# Altium PCB PCB_Microfonos.PcbDoc
Units mm, origin at the board's own origin, x right, y up, seen from the top; angles counter-clockwise.
Board outline 50 x 50 mm, 2 copper layers (Top Layer, Bottom Layer); 36 components, 18 nets, 90 pads, 13 vias.
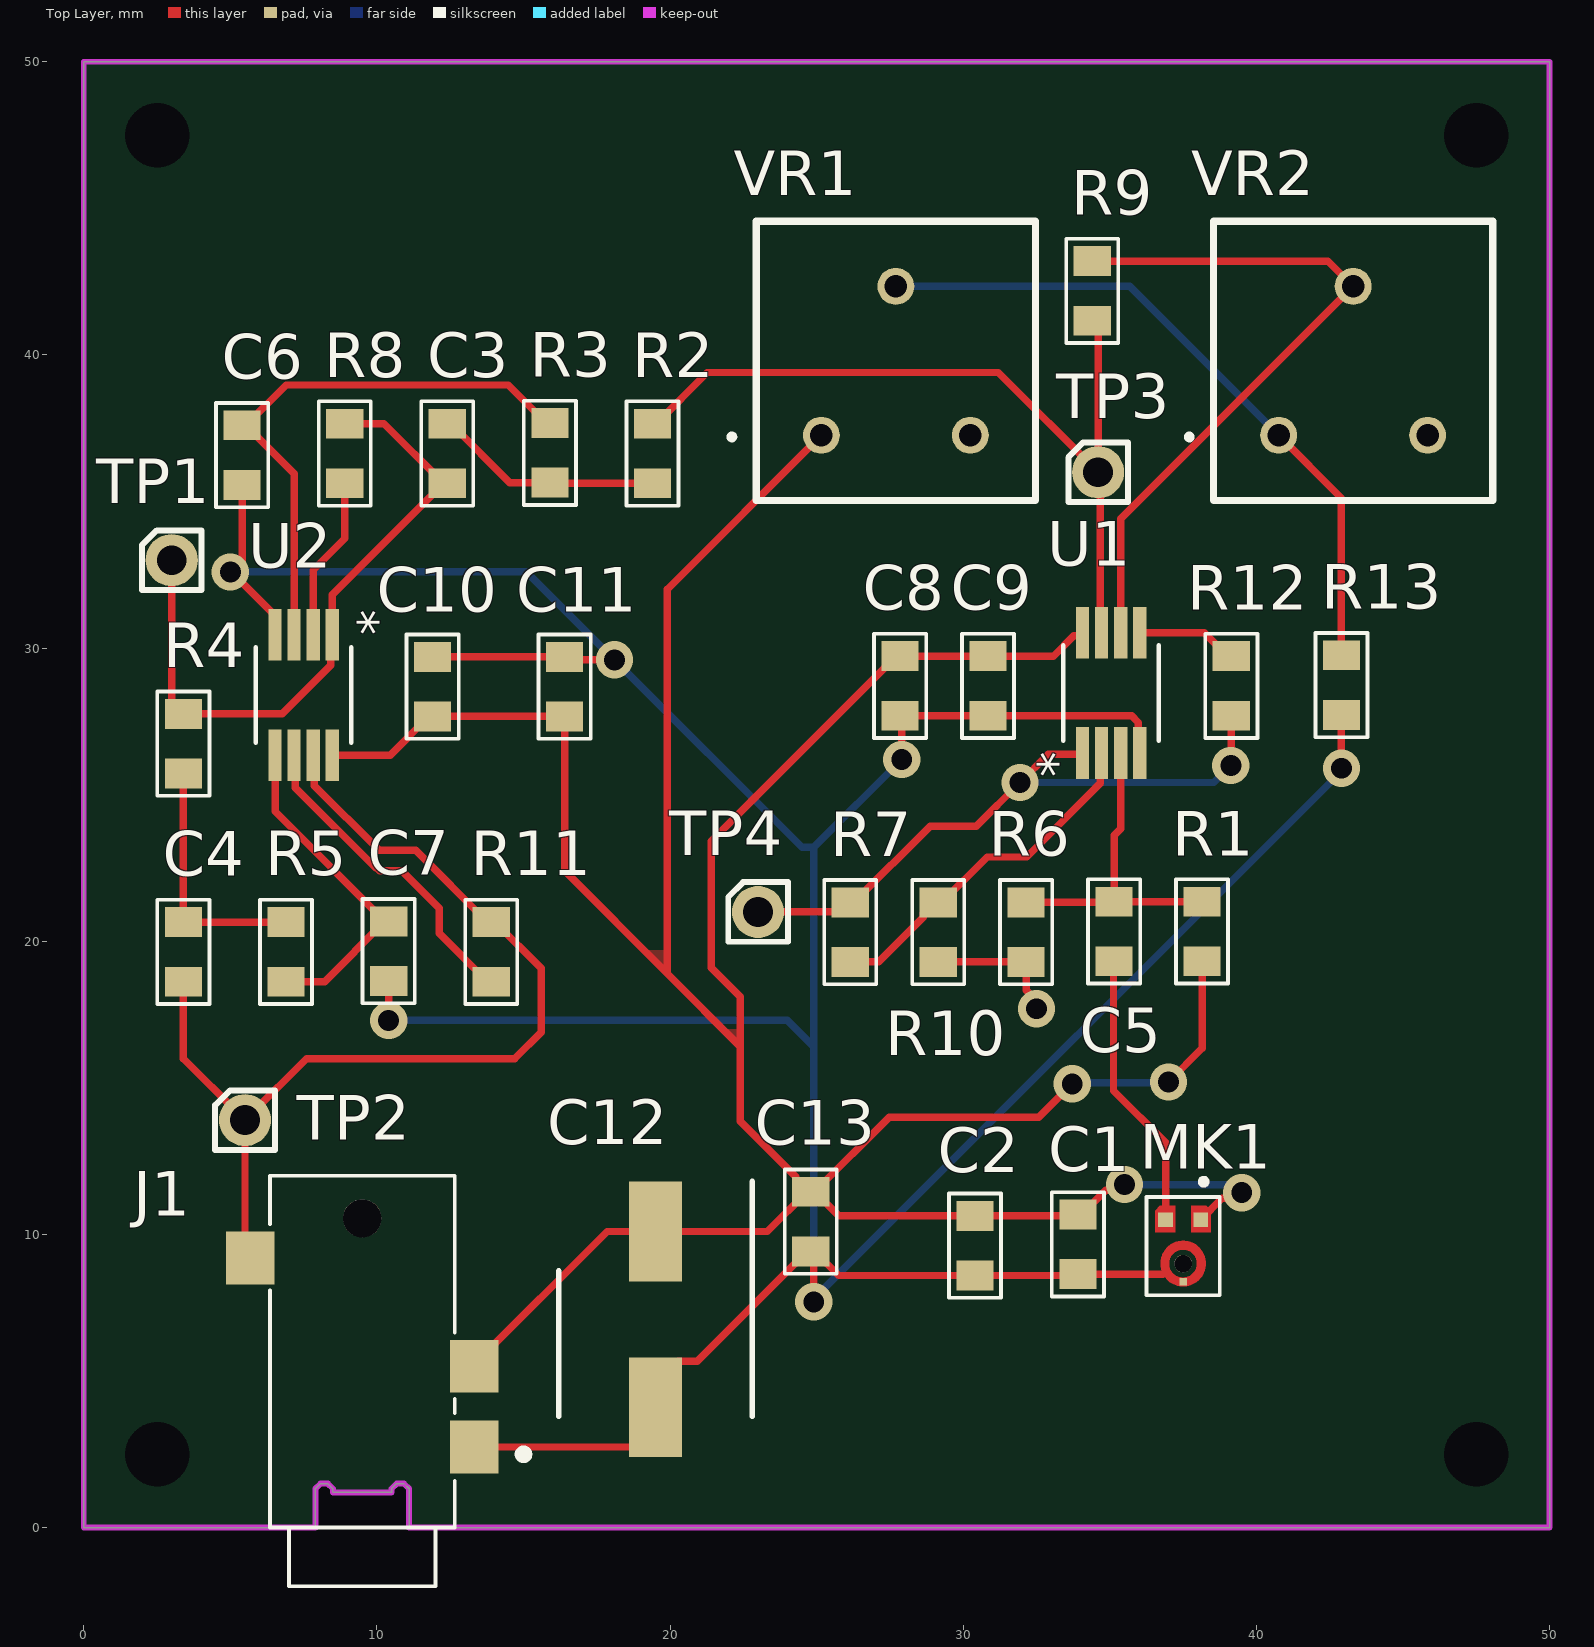
[diagram p0: Top Layer view]
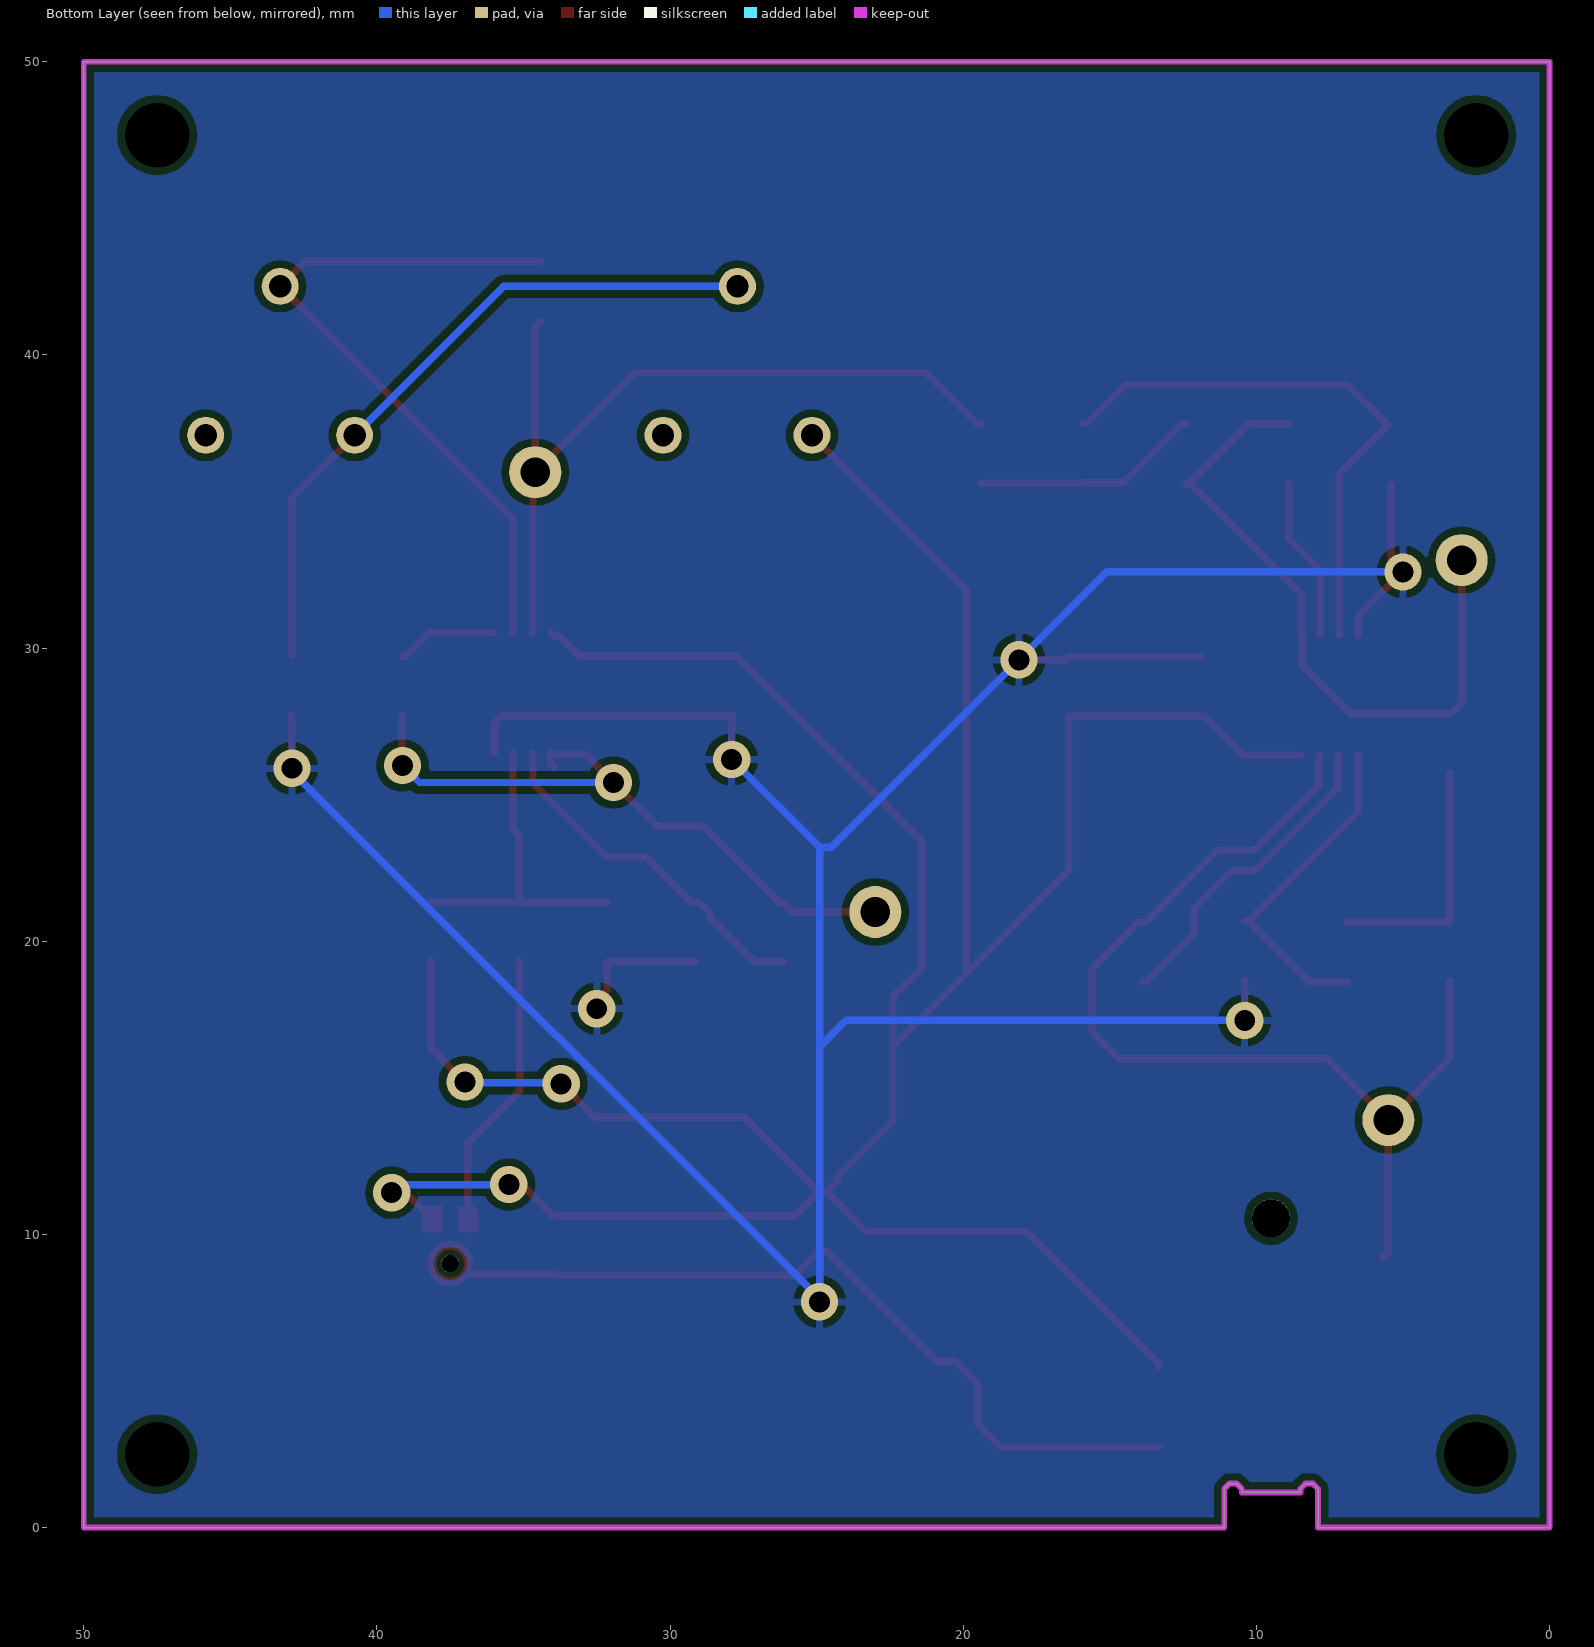
[diagram p1: Bottom Layer view, seen from below]

## Layer stack, top to bottom
Top Solder: solder mask 0.0102, Solder Resist, Dk 3.5
Top Layer: signal copper 0.0356
Dielectric 1: dielectric 0.32, FR-4, Dk 4.8
Bottom Layer: signal copper 0.0356
Bottom Solder: solder mask 0.0102, Solder Resist, Dk 3.5

## Board outline
11.1,1.325 10.925,1.5 10.675,1.5 10.5,1.325 10.5,1.2 8.5,1.2 8.5,1.3 8.5,1.325 8.325,1.5 8.2,1.5 8.075,1.5 7.9,1.325 7.9,1.2 7.9,0 0,0 0,50 50,50 50,0 11.1,0

## Design rules (kind name [scope] priority, off if disabled: settings)
Clearance [All] p1: gap=0.089 ignorepadtopadclearanceinfootprint=FALSE
HoleSize [All] p1: absolutevalues=TRUE maxlimit=6.3 minlimit=0.2 maxpercent=80.000 minpercent=20.000
MinimumSolderMaskSliver [All] p1: minsoldermaskwidth=0.089
PolygonConnect [All] p1: connectstyle=Relief reliefconductorwidth=0.254 reliefentries=4 polygonreliefangle="90 Angle" airgapwidth=0.254
RoutingVias [All] p1: holewidth=0.711 width=1.27 viastyle="Through Hole" minholewidth=0.2 minwidth=0.45 maxholewidth=0.711 maxwidth=1.27
SilkToSolderMaskClearance [IsPad] p1: minsilkscreentomaskgap=0.2 clearancetoexposedcopper=TRUE
SolderMaskExpansion [All] p1: expansion=0.102 istentingtop=FALSE
Width [All] p1: maxlimit=0.254 minlimit=0.127 preferedwidth=0.254
27 further rules are at their usual default settings.

## Classes and differential pairs
component class MICROFONO: C1 C2 MK1
component class "FILTRADO Y AMPLIFICACION": C3 C4 C5 C6 C7 C8 C9 C10 C11 R1 R2 R3 R4 R5 R6 R7 R8 R9 R10 R11 R12 R13 TP1 TP2 TP3 TP4 U1 U2 VR1 VR2
component class CONECTOR: C12 C13 J1

## Components (designator, comment, footprint, x,y, rotation, side; value= is the part's Value field where it differs from the comment)
C1 "100nF" 0805C-TBD 33.911,10.425 r270 top
C2 "100p" 0805C-GENERIC 30.4,10.378 r270 top
C3 "3.6n" 0805C-GENERIC 12.4,37.4 r270 top
C4 "5.6n" 0805C-GENERIC 3.4,20.4 r270 top
C5 "3u" 0805C-GENERIC 35.144,19.572 r90 top
C6 "360p" 0805C-GENERIC 5.4,35.822 r90 top
C7 "470p" 0805C-GENERIC 10.4,18.9 r90 top
C8 "100n" 0805C-GENERIC 27.844,29.472 r270 top
C9 "100p" 0805C-GENERIC 30.844,29.472 r270 top
C10 "100n" 0805C-GENERIC 11.9,27.922 r90 top
C11 "100p" 0805C-GENERIC 16.4,27.922 r90 top
C12 "EEE-HC1C101XP" CAPAE660X800N 19.5,7.1 r270 top
C13 "10u" 0805C-GENERIC 24.8,11.2 r270 top
J1 "SJ2-35953A-SMT-TR" CUI_SJ2-35953A-SMT-TR 9.5,6 r90 top
MK1 "INMP510" XDCR_INMP510 37.5,9.6 r270 top
R1 "110k" 0805R-GENERIC 38.144,19.572 r90 top
R2 "1.6k" 0805R-GENERIC 19.4,37.4 r270 top
R3 "47k" 0805R-GENERIC 15.9,35.9 r90 top
R4 "5.1k" 0805R-GENERIC 3.4,27.5 r270 top
R5 "5.1k" 0805R-GENERIC 6.9,20.4 r270 top
R6 "1.8k" 0805R-GENERIC 32.144,21.072 r270 top
R7 "62k" 0805R-GENERIC 26.144,21.072 r270 top
R8 "51k" 0805R-GENERIC 8.9,37.4 r270 top
R9 "20k" 0805R-GENERIC 34.4,41.422 r90 top
R10 "2k" 0805R-GENERIC 29.144,21.072 r270 top
R11 "10k" 0805R-GENERIC 13.9,20.4 r270 top
R12 "5.6k" 0805R-GENERIC 39.144,29.472 r270 top
R13 "820" 0805R-GENERIC 42.9,29.5 r270 top
TP1 "LPFE1" TESTPIN 3,33 r0 top
TP2 "LPFE2" TESTPIN 5.5,13.9 r0 top
TP3 "AMP" TESTPIN 34.6,36 r0 top
TP4 "HPF" TESTPIN 23,21 r0 top
U1 "Part Number: ADA4661-2ARMZ-R7" RM_8 35.044,28.472 r90 top value=Value
U2 "Part Number: ADA4661-2ARMZ-R7" RM_8 7.5,28.4 r270 top value=Value
VR1 "3310Y-001-102L" 3310Y-001 27.7,39.8 r0 top
VR2 "3310Y-001-103L" 3310Y-001 43.3,39.8 r0 top

## Footprints (in the part's own frame and the unit in brackets; to place one, negate y for a bottom-side part, rotate by r counter-clockwise, add the part's x,y. Pads: shape width x height; smd on the part's side, far side on the other; paste and mask are expansions set on the pad)
0805C-GENERIC [mil] "CAPACITOR 0805"
  rect 40x50 smd: 1(-10,0) 2(70,0)
  silkscreen extent -40,-35 100,35, body extent -11,-25 70,25, height 26
0805C-TBD [mil] "CAPACITOR 0805"
  rect 40x50 smd: 1(-10,0) 2(70,0)
  silkscreen extent -40,-35 100,35, body extent -11,-25 70,25, height 26
0805R-GENERIC [mil] "RESISTOR 0805"
  rect 40x50 smd: 1(-10,0) 2(70,0)
  silkscreen extent -40,-35 100,35, body extent -11,-25 70,25, height 27
3310Y-001 [mm]
  round 1.26 hole 0.76: 1(-2.54,-2.54) 2(0,2.54) 3(2.54,-2.54)
  silkscreen extent -5.65,-4.77 4.77,4.77, body extent -4.7,-4.76 4.83,4.76, height 6.38
CAPAE660X800N [mm]
  rect 3.4x1.8 smd: 1(-3,0) 2(3,0)
  silkscreen extent -4.7,-3.3 3.3,3.3, body extent -3.9,-3.4 3.9,3.4, height 8
CUI_SJ2-35953A-SMT-TR [mm]
  rect 1.8x1.65 smd: 1(-3.25,-3.825) 2(3.2,3.825) 3(-0.5,-3.825)
  round 1.3 hole 1.3 unplated: ""(4.55,0)
  silkscreen extent -8,-5.65 6,3.15
RM_8 [mm]
  rect 1.761x0.451 smd paste+0 mask+0: 1(-2.05,0.975) 2(-2.05,0.325) 3(-2.05,-0.325) 4(-2.05,-0.975) 5(2.05,-0.975) 6(2.05,-0.325) 7(2.05,0.325) 8(2.05,0.975)
  silkscreen extent -1.63,-1.63 1.63,1.63, body extent 0,0 0.25,0.25, height 0.25
TESTPIN [mil]
  round 70 hole 40: 1(0,0)
  silkscreen extent -40,-40 40,40, body extent -40,-40 40,40, height 470
XDCR_INMP510 [mm]
  rect 0.5x0.5 smd paste-1 mask+0: 1(-0.905,0.6) 2(-0.905,-0.6)
  rect 0.25x0.25 smd paste-1 mask+0: 3(1.215,0)
  round 0.6 hole 0.6 unplated: ""(0.595,0)
  Top Layer region: -0.475,0.27 -1.375,0.27 -1.375,0.79 -1.215,0.95 -0.475,0.95
  Top Layer region: -0.475,-0.95 -1.215,-0.95 -1.375,-0.79 -1.375,-0.27 -0.475,-0.27
  Top Layer region: 248 vertices and 0 holes, not listed, extent -0.18,-0.77 1.37,0.77
  silkscreen extent -2.3,-1.25 1.67,1.25

## Part data
C1: library part 0805C-100nF-25V-X7R-MUR, "CAPACITOR 0805 CERAMIC", Supplier Part Number 1=490-1673-1-ND, Supplier 1=Digi-Key
C2 C3 C4 C5 C6 C7 C8 C9 C10 C11 C13: library part C0805-GENERIC, "GENERIC CAPACITOR NON POLARISED0603"
C12: "Capacitor Polarised", Manufacturer_Name=Panasonic, Mouser Part Number=667-EEE-HC1C101XP, Allied Price/Stock=https://www.alliedelec.com/panasonic-eee-hc1c101xp/70258549/, Allied_Number=70258549, Datasheet Link=http://industrial.panasonic.com/www-cgi/jvcr13pz.cgi?E+PZ+3+ABA0109+EEEHC1C101XP+7+WW, Height=8mm, Manufacturer_Part_Number=EEE-HC1C101XP, Mouser Price/Stock=https://www.mouser.com/Search/Refine.aspx?Keyword=667-EEE-HC1C101XP
J1: "3.5 mm, Stereo, Right Angle, Surface Mount _SMT_, Audio Jack Connector", Package=None, Availability=Unavailable, CUI_purchase_URL=https://www.cuidevices.com/product/interconnect/connectors/audio-connectors/jacks/sj2-3595x-smt-series?utm_source=snapeda.com&utm_medium=referral&utm_campaign=snapedaBOM, MF="CUI Devices", MP=SJ2-35953A-SMT-TR, Price=None, SnapEDA_Link=https://www.snapeda.com/parts/SJ2-35953A-SMT-TR/CUI%20Devices/view-part/701771/?ref=snap
MK1: "60Hz ~ 20kHz Analog Microphone MEMS _Silicon_ 1.5V ~ 3.63V Omnidirectional _-38dB Â±2dB @ 94dB SPL_ Solder Pads", Package="LGA-3 TDK-InvenSense", Digi-Key_Part_Number=1428-1016-2-ND, Digi-Key_Purchase_URL=https://www.digikey.com/product-detail/en/tdk-invensense/INMP510ACEZ-R7/1428-1016-2-ND/4311534?utm_source=snapeda&utm_medium=aggregator&utm_campaign=symbol, MF="TDK InvenSense", MP=INMP510, SnapEDA_Link=https://www.snapeda.com/parts/INMP510/TDK%20InvenSense/view-part/2757133/?ref=snap
R1 R2 R3 R4 R5 R6 R7 R8 R9 R10 R11 R12 R13: library part R0805-GENERIC, "GENERIC RESISTOR 0805"
TP1 TP2 TP3 TP4: library part TESTPIN, "TESTPIN SINGLE PIN HEADER", Manufacturer 1="Sharon Long Industries", Manufacturer Part Number 1=Cut-it-yourself, Supplier 1 Part number=Cut-It-Yourself, Reel=TH, Supplier 1="Sharon Long Industries"
U1 U2: library part ADA4661-2ARMZ-R7, "No Description Available", Built_By=EMA_Christopher, Copyright="Copyright (C) 2016 Accelerated Designs. All rights reserved", Manufacturer_Part_Number=ADA4661-2ARMZ-R7, RefDes=RefDes, Type=DEV, Vendor="Analog Devices Inc"
VR1: library part 3310Y-001-103L, "Variable Resistor", Manufacturer_Name=Bourns, Mouser Part Number=652-3310Y-001-103L, RS Part Number=5220625P, Datasheet Link=http://www.bourns.com/docs/Product-Datasheets/3310.pdf, Manufacturer_Part_Number=3310Y-001-103L, Mouser Price/Stock=https://www.mouser.com/Search/Refine.aspx?Keyword=652-3310Y-001-103L, RS Price/Stock=http://uk.rs-online.com/web/p/products/5220625P
VR2: "Variable Resistor", Manufacturer_Name=Bourns, Mouser Part Number=652-3310Y-001-103L, RS Part Number=5220625P, Datasheet Link=http://www.bourns.com/docs/Product-Datasheets/3310.pdf, Manufacturer_Part_Number=3310Y-001-103L, Mouser Price/Stock=https://www.mouser.com/Search/Refine.aspx?Keyword=652-3310Y-001-103L, RS Price/Stock=http://uk.rs-online.com/web/p/products/5220625P

## Free pads (board coordinates)
  round 1.524 hole 2.2 unplated: ""(2.5,2.5) ""(2.5,47.5) ""(47.5,2.5) ""(47.5,47.5)

## Via types
v1: diameter 1.27, hole 0.711, Top Layer to Bottom Layer, 13 vias

## Nets (pads, with @x,y where several pads share a name; then routed paths per layer and width w, separated by ;. In a path a pad name is that pad's centre, name@x,y a point inside that pad or via, vN(x,y) a via of type N, cw(c..) or ccw(c..) an arc to the next point about the centre after c; other vN are vias at no path point)
GND: C1.2 C2.2 C6.1 C7.1 C8.2 C9.2 C10.2 C11.2 C12.2 C13.2 J1.1 MK1.3 R6.2 R10.2 R13.2 U1.4 U2.4 | length 143.9
  Top Layer w0.254: v1(5,32.6) 5.03,32.6 6.525,31.105 U2.4 ; v1@5.4,32.6 C6.1 ; v1(10.4,17.3) C7.1 ; C10.2 C11.2 16.5,29.6 v1(18.1,29.6) ; J1.1 18.727,2.75 19.5,3.523 C12.2 19.5,4.9 20.273,5.673 20.924,5.673 24.673,9.422 C13.2 ; v1(24.9,7.7) 24.9,9.322 C13.2 ; v1(27.9,26.2) 27.9,27.639 C8.2 C9.2 35.742,27.694 35.976,27.461 35.976,26.466 U1.4 ; R10.2 R6.2 32.144,18.331 32.5,17.975 v1(32.5,17.7) ; 36.814,8.65 36.81,8.647 C1.2 33.864,8.6 25.749,8.6 24.927,9.422 C13.2 ; v1(42.9,25.9) R13.2
  Bottom Layer w0.254: v1(5,32.6) 15.1,32.6 v1(18.1,29.6) 24.5,23.2 24.9,23.2 ; v1(10.4,17.3) 24,17.3 24.9,16.4 ; v1(24.9,7.7) v1@24.9,7.8 ; v1(27.9,26.2) 24.9,23.2 ; v1(42.9,25.9) 42.9,25.8 v1@24.9,7.8 ; v1@24.9,7.8 24.9,16.4 ; 24.9,16.4 24.9,23.2
In_E1: C6.2 R3.2 U2.3 | length 19.3
  Top Layer w0.254: U2.3 7.175,35.952 5.527,37.6 6.902,38.975 14.476,38.975 15.773,37.678 R3.2
In_E2: C7.2 R5.2 U2.5 | length 11.6
  Top Layer w0.254: U2.5 6.525,24.426 C7.2@10.273,20.678 ; R5.2 8.217,18.622 C7.2@10.273,20.678 ; C7.2 C7.2@10.273,20.678
In_HP: C5.2 R1.2 R6.1 U1.3 | length 11.2
  Top Layer w0.254: R6.1 35.12,21.326 C5.2 ; U1.3 35.369,23.834 35.144,23.609 C5.2 ; R1.2 C5.2
NetC3_1: C3.1 R2.2 R3.1 | length 7.8
  Top Layer w0.254: C3.1 12.527,37.654 14.535,35.646 R3.1 15.924,35.622 R2.2
NetC4_1: C4.1 R4.2 R5.1 | length 8.6
  Top Layer w0.254: R4.2 C4.1 R5.1
NetC5_1: C5.1 MK1.2 | length 9.6
  Top Layer w0.254: C5.1 35.125,19.299 35.125,14.9 36.9,13.125 MK1.2
NetR7_2: R7.2 R10.1 U1.2 | length 12.2
  Top Layer w0.254: R7.2 27.112,19.294 28.636,20.818 28.636,20.945 29.017,21.326 R10.1 29.271,21.326 30.82,22.875 32.167,22.875 34.676,25.384 34.676,26.379 U1.2
NetR8_2: R8.2 U2.2 | length 5.6
  Top Layer w0.254: U2.2 7.825,32.663 8.9,33.738 R8.2
NetR9_2: R9.2 U1.6 VR2.2 | length 24.4
  Top Layer w0.254: R9.2 42.44,43.2 VR2.2 35.369,34.409 U1.6
NetR11_2: R11.2 U2.6 | length 11.1
  Top Layer w0.254: U2.6 7.219,26.306 7.219,25.243 9.962,22.5 10,22.5 10.1,22.4 10.851,22.4 12.122,21.13 12.122,20.273 13.773,18.622 R11.2
NetR12_1: R12.1 U1.5 | length 3.5
  Top Layer w0.254: U1.5 38.221,30.522 39.017,29.726 R12.1
NetR13_1: R13.1 VR1.2 VR2.1 | length 23.6
  Top Layer w0.254: VR2.1@40.76,37.31 VR2.1 42.9,35.12 R13.1
  Bottom Layer w0.254: VR1.2 35.68,42.34 VR2.1
Out_A: R2.1 R9.1 TP3.1 U1.7 | length 28.1
  Top Layer w0.254: R2.1 19.527,37.654 21.273,39.4 31.2,39.4 TP3.1 ; R9.1 34.6,40.968 TP3.1 ; U1.7 34.676,30.566 34.676,35.924 TP3.1
Out_E1: C3.2 R4.1 R8.1 TP1.1 U2.1 | length 23.3
  Top Layer w0.254: TP1.1 3,28.135 3.381,27.754 R4.1 6.774,27.754 8.431,29.412 8.431,30.406 U2.1 8.475,31.824 C3.2@12.273,35.622 ; R8.1 10.241,37.654 C3.2@12.273,35.622 ; C3.2 C3.2@12.273,35.622
Out_E2: C4.2 J1.2 R11.1 TP2.1 U2.7 | length 35.1
  Top Layer w0.254: C4.2 3.4,16 5.3,14.1 5.7,14.1 7.6,16 14.7,16 15.6,16.9 15.6,19.081 14.027,20.654 R11.1 13.773,20.654 11.327,23.1 10.08,23.1 7.869,25.312 7.869,26.306 U2.7 ; TP2.1 5.5,9.375 J1.2
Out_HP: R7.1 R12.2 TP4.1 U1.1 | length 23
  Top Layer w0.254: TP4.1 25.818,21 R7.1 26.271,21.326 28.87,23.925 30.444,23.925 v1(31.934,25.416) 32.894,26.375 34.022,26.375 U1.1 34.069,26.021 U1.1@33.971,25.923 ; v1(39.127,25.995) 39.144,26.012 R12.2
  Bottom Layer w0.254: v1(31.934,25.416) 38.548,25.416 v1(39.127,25.995)
VCC: C1.1 C2.1 C8.1 C9.1 C10.1 C11.1 C12.1 C13.1 J1.3 MK1.1 R1.1 U1.8 U2.8 VR1.1 | length 121.3
  Top Layer w0.254: U2.8 10.455,26.35 11.773,27.668 C10.1 C11.1 16.4,22.4 19.9,18.9 ; J1.3 13.325,5.575 17.85,10.1 C12.1 23.319,10.1 C13.1@24.673,11.454 ; VR1.1 19.9,32 19.9,18.9 ; v1(33.716,15.137) 32.579,14 27.473,14 C13.1@24.927,11.454 ; U1.8 33.972,30.425 33.775,30.425 33.076,29.726 C9.1 C8.1 27.717,29.726 21.4,23.409 21.4,19.1 22.398,18.102 22.398,16.402 ; v1(35.5,11.7) 35.306,11.506 34.865,11.506 34.038,10.679 C1.1 33.864,10.632 C2.1 25.749,10.632 C13.1@24.927,11.454 ; v1(37,15.2) 38.144,16.344 R1.1 ; MK1.1 38.826,11.231 39.303,11.231 v1(39.498,11.426) ; 19.9,18.9 22.398,16.402 ; 22.398,16.402 22.398,13.856 24.292,11.962 24.292,11.835 C13.1@24.673,11.454 ; C13.1@24.673,11.454 C13.1@24.927,11.454
  Bottom Layer w0.254: v1(33.716,15.137) 33.748,15.168 36.968,15.168 v1(37,15.2) ; v1(35.5,11.7) 39.223,11.7 v1(39.498,11.426)
pads on no net: J1. MK1. VR1.3 VR2.3

## Polygon pours and split planes (outlines as drawn)
GND on Bottom Layer "GND_L02_P000" (solid, remove dead copper, pour order 0): 0,50 50,50 50,0 0,0
VCC on Top Layer "VCC_L01_P002" (solid, remove dead copper, pour order 2): 21.8,17 22.4,17 22.4,16.403 22.398,16.402
VCC on Top Layer "VCC_L01_P001" (solid, pour order 1): 19,19.7 20,19.7 20,18.7

## Keep-outs
Keep-Out Layer:
  the board outline again, w0.2

## Text inside footprints (layer, text, board x,y; h text height)
U1: Top Overlay "*" at 33.8,25.6 h1.27 r90; Mechanical 13 "*" at 34.89,27.036 h1.27 r90
U2: Top Overlay "*" at 8.8,31.3 h1.27 r270; Mechanical 13 "*" at 7.654,29.836 h1.27 r270